# Altium PCB PCB1.PcbDoc
Units mm, origin at the board's own origin, x right, y up, seen from the top; angles counter-clockwise.
Board outline 152.4 x 101.6 mm, 2 copper layers (Top Layer, Bottom Layer); 8 components, 5 nets, 19 pads, 0 vias.
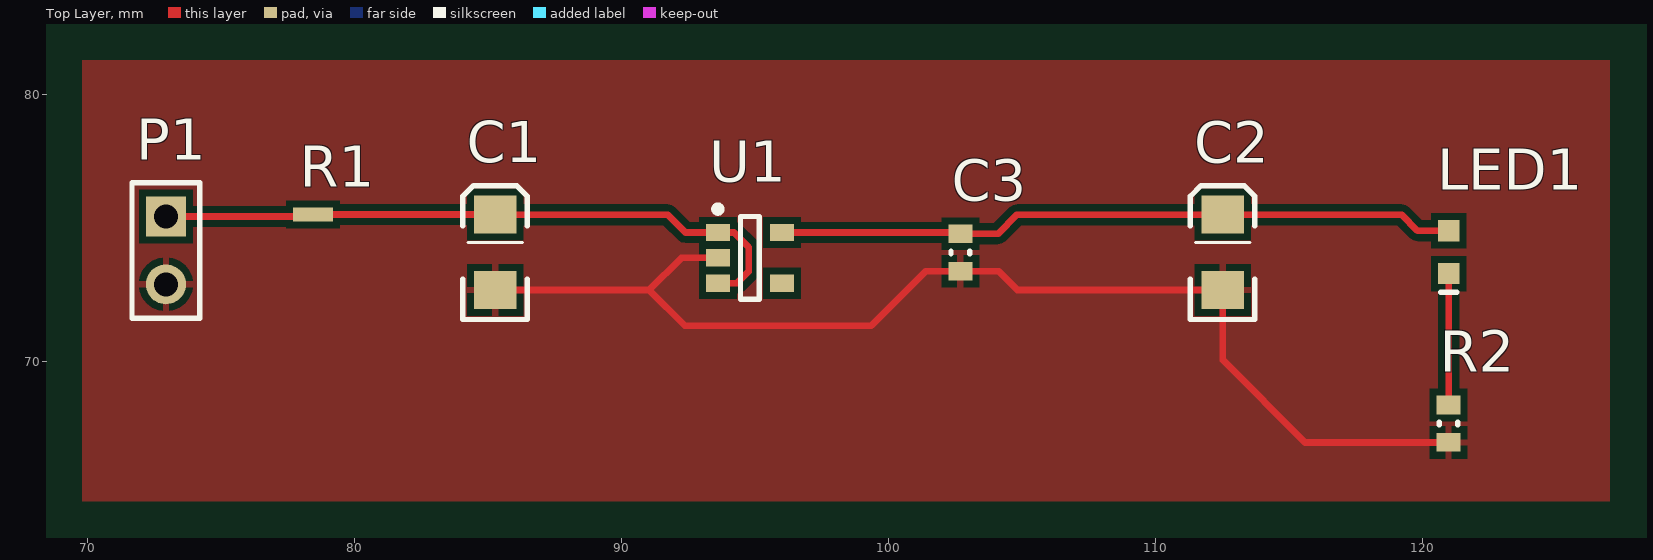
[diagram p0: Top Layer view]
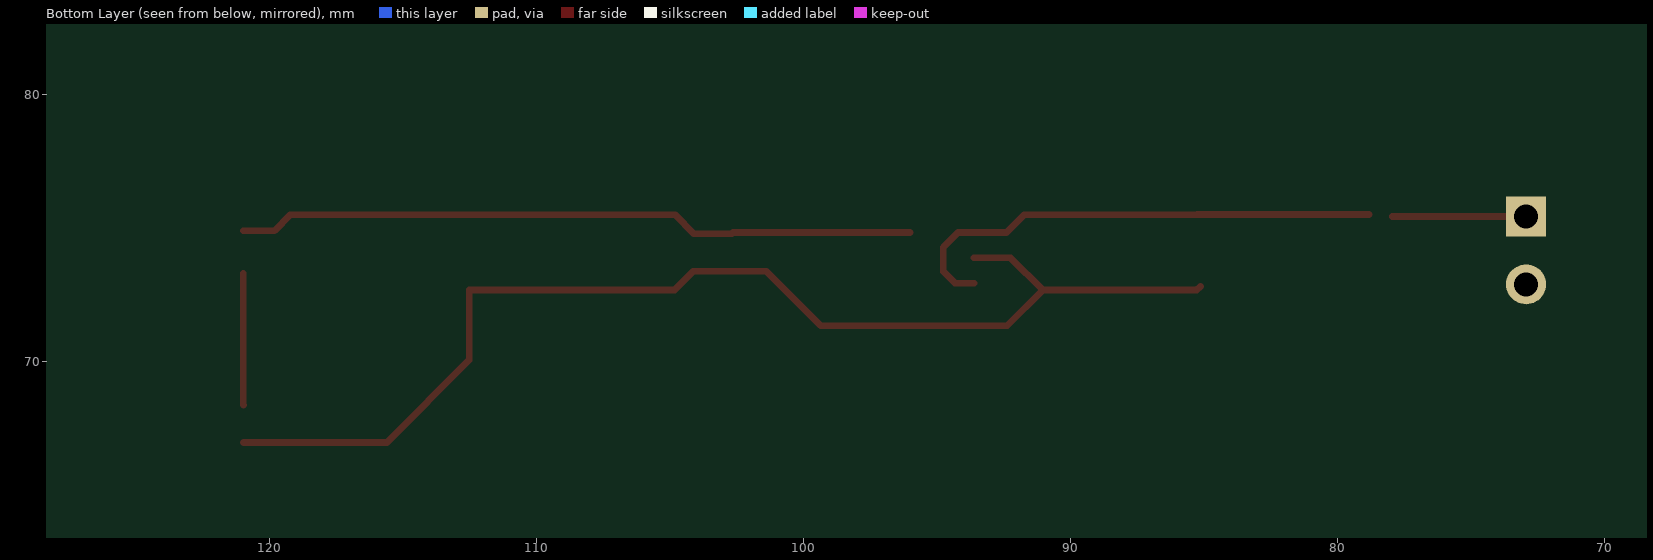
[diagram p1: Bottom Layer view, seen from below]

## Layer stack, top to bottom
Top Solder: solder mask 0.0102, Solder Resist, Dk 3.5
Top Layer: signal copper 0.0356
Dielectric1: dielectric 0.32, FR-4, Dk 4.8
Bottom Layer: signal copper 0.0356
Bottom Solder: solder mask 0.0102, Solder Resist, Dk 3.5

## Board outline
25.4,25.4 177.8,25.4 177.8,127 25.4,127

## Design rules (kind name [scope] priority, off if disabled: settings)
Clearance [All] p1: gap=0.254 ignorepadtopadclearanceinfootprint=FALSE except(0: Arc-Hole Track-Hole SMDPad-Hole THPad-Hole Via-Hole Fill-Hole Poly-Hole Region-Hole Text-Hole)
PolygonConnect PolygonConnect_NetTie [HasFootprint('NetTie')] p1: connectstyle=Direct reliefconductorwidth=0.254 reliefentries=4 polygonreliefangle="90 Angle" airgapwidth=0.254
PolygonConnect [All] p2: connectstyle=Relief reliefconductorwidth=0.254 reliefentries=4 polygonreliefangle="90 Angle" airgapwidth=0.254
RoutingVias [All] p1: holewidth=0.711 width=1.27 viastyle="Through Hole" minholewidth=0.711 minwidth=1.27 maxholewidth=0.711 maxwidth=1.27
ShortCircuit ShortCircuit_1 [InNet('GND') vs InNet('CGND')] p1: allowed=TRUE
ShortCircuit [All] p2: allowed=FALSE
SolderMaskExpansion [All] p1: expansion=0.102
Width [All] p1: maxlimit=0.508 minlimit=0.254 preferedwidth=0.254
29 further rules are at their usual default settings.

## Components (designator, comment, footprint, x,y, rotation, side; value= is the part's Value field where it differs from the comment)
C1 "10µF" CAPC3216_L 85.281,74.083 r90 top
C2 "10µF" CAPC3216_L 112.521,74.083 r90 top
C3 "0.1µF" CAPC0603_L 102.695,74.09 r90 top
LED1 "Red" 0603_A 120.98,74.103 r90 top
P1 "Header 2" HDR1X2 72.949,75.438 r270 top
R1 "NetTie" NetTie 78.461,75.514 r0 top net-tie
R2 "10K" RESC0603_L 120.97,67.68 r90 top value="10000.00 Ohm"
U1 "MIC5205-3.3" SOT-23-OT5_L 94.815,73.89 r0 top

## Footprints (in the part's own frame and the unit in brackets; to place one, negate y for a bottom-side part, rotate by r counter-clockwise, add the part's x,y. Pads: shape width x height; smd on the part's side, far side on the other; paste and mask are expansions set on the pad)
0603_A [mm] "Chip LED, 2-Leads, Body 1.6x0.8mm, IPC Medium Density"
  rect 0.8x0.8 smd: 1(-0.8,0) 2(0.8,0)
  silkscreen extent -1.5,-0.3 -1.5,0.3, body extent -0.8,-0.4 0.8,0.4, height 0.7
CAPC0603_L [mm] "Chip Capacitor, Body 1.6x0.8mm, Height 1.0mm, IPC High Density"
  rect 0.7x0.9 smd: 1(-0.7,0) 2(0.7,0)
  silkscreen extent -0.05,-0.35 0.05,0.35, body extent -0.87,-0.47 0.88,0.48, height 1
CAPC3216_L [mil] "EIA3216"
  rect 56x63 smd: 1(56,0) 2(-55.12,0)
  silkscreen extent -98,-47 99,48, body extent -55,-34 57,34, height 79
HDR1X2 [mm] "Connector; Header; 2 Position"
  rect 1.5x1.5 hole 0.9: 1(0,0)
  round 1.5 hole 0.9: 2(2.54,0)
  silkscreen extent -1.27,-1.27 3.81,1.27
NetTie [mil]
  rect 30x20 smd mask-15.75: 1(-14.5,0) 2(14.5,0)
RESC0603_L [mm] "Chip Resistor, Body 1.6x0.8mm, IPC High Density"
  rect 0.7x0.9 smd: 1(-0.7,0) 2(0.7,0)
  silkscreen extent -0.05,-0.35 0.05,0.35, body extent -0.85,-0.47 0.85,0.47, height 0.6
SOT-23-OT5_L [mm] "SOT23, 5-Leads, Body 2.9x1.6mm, Pitch 0.95mm, Lead Span 2.7mm, IPC High Density"
  rect 0.9x0.65 smd: 1(-1.2,0.95) 2(-1.2,0) 3(-1.2,-0.95) 4(1.2,-0.95) 5(1.2,0.95)
  silkscreen extent -1.32,-1.55 0.35,1.95, body extent -0.9,-1.55 0.9,1.55, height 1.45

## Part data
C1 C2: library part CAP_10uF, "CAP TANT 10UF 10V 10% 1206", ESR (Equivalent Series Resistance)="3.8 Ohm", Lifetime @ Temp.="2000 Hrs @ 85°C", Manufacturer=Kemet, Manufacturer Part Number=T491A106K010AT, Manufacturer Size Code=A, Operating Temperature="-55°C ~ 125°C", Package / Case="1206 (3216 Metric)", Supplier Part Number 1=399-3684-1-ND, TOLERANCE=±10%, Voltage - Rated=10V, Capacitance=10µF, Category=Capacitors, ComponentLink1Description=http://www.kemet.com/Lists/ProductCatalog/Attachments/254/KEM_T2005_T491.pdf, ComponentLink1URL=http://www.kemet.com/Lists/ProductCatalog/Attachments/254/KEM_T2005_T491.pdf, Features="General Purpose", Height - Seated (Max)="0.071\" (1.80mm)", Lead Spacing=-, Mounting Type="Surface Mount", Packaging="Cut Tape (CT)", Pricing 1="1=0.38, 10=0.337, 50=0.2044, 100=0.1684, 250=0.13468, 500=0.12266, 1000=0.11063 (USD)", RoHS="RoHS Compliant", Size / Dimension="0.126\" L x 0.063\" W (3.20mm x 1.60mm)", Stock 1=578846, Supplier 1=Digi-Key, Type=Molded
C3: library part CAP_100nF, "CAP CER 0.1UF 25V 10% X5R 0603", Manufacturer="Samsung Electro-Mechanics America, Inc", Manufacturer Part Number=CL10A104KA8NNNC, Operating Temperature="-55°C ~ 85°C", Package / Case="0603 (1608 Metric)", Ratings=-, Supplier Part Number 1=1276-1857-1-ND, Temperature Coefficient=X5R, TOLERANCE=±10%, Voltage - Rated=25V, Applications="General Purpose", Capacitance=0.1µF, Category=Capacitors, ComponentLink1Description=http://www.samsungsem.com/global/support/library/product-catalog/__icsFiles/afieldfile/2014/11/13/MLCC.pdf, ComponentLink1URL=http://www.samsungsem.com/global/support/library/product-catalog/__icsFiles/afieldfile/2014/11/13/MLCC.pdf, Features=-, Height - Seated (Max)=-, Lead Spacing=-, Lead Style=-, Mounting Type="Surface Mount, MLCC", Packaging="Cut Tape (CT)", Pricing 1="1=0.1, 10=0.036, 25=0.0256, 100=0.0165, 500=0.01156, 1000=0.009 (USD)", RoHS="RoHS Compliant", Size / Dimension="0.063\" L x 0.031\" W (1.60mm x 0.80mm)", Stock 1=17485, Supplier 1=Digi-Key, Thickness (Max)="0.035\" (0.90mm)"
LED1: library part LED_RED_0603, "SMD mono-color Chip LED, Red", Current - Test=20mA, Lens Color=Colorless, Manufacturer="Lite-On Inc", Manufacturer Part Number=LTST-C190KRKT, Millicandela Rating=99mcd, Package / Case="0603 (1608 Metric)", Supplier Part Number 1=160-1436-1-ND, Voltage - Forward (Vf) (Typ)=2V, Category=Optoelectronics, Color=Red, ComponentLink1Description=http://optoelectronics.liteon.com/upload/download/DS-22-99-0151/S_110_LTST-C190KRKT.pdf, ComponentLink1URL=http://optoelectronics.liteon.com/upload/download/DS-22-99-0151/S_110_LTST-C190KRKT.pdf, Height (Max)=0.80mm, Lens Style/Size="Rectangle with Flat Top, 1.10mm x 0.80mm", Lens Transparency=Clear, Mounting Type="Surface Mount", Packaging="Cut Tape (CT)", Pricing 1="1=0.28, 10=0.218, 100=0.1188, 250=0.0792, 500=0.06732, 1000=0.05148 (USD)", RoHS="RoHS Compliant", Size / Dimension="1.60mm L x 0.80mm W", Stock 1=295836, Supplier 1=Digi-Key, Viewing Angle=130°, Wavelength - Dominant=631nm, Wavelength - Peak=639nm
P1: "Header, 2-Pin", LatestRevisionDate=17-Jul-2002, LatestRevisionNote="Re-released for DXP Platform.", Publisher="Altium Limited"
R1: "Used to bridge two uniquely named Nets together"
R2: library part RES_10K, "RES SMD 10K OHM 5% 1/10W 0603", Case-EIA=0603, Case-Metric=1608, Manufacturer="Panasonic Electronic Components", Manufacturer Part Number=ERJ-3GEYJ103V, Operating Temperature="-55°C ~ 155°C", Package / Case="0603 (1608 Metric)", POWER="0.1 W", Power (Watts)="0.1W, 1/10W", Resistance (Ohms)=10k, Supplier Part Number 1=P10KGCT-ND, Temperature Coefficient=±200ppm/°C, TOLERANCE="5 %", Category=Resistors, ComponentLink1Description=http://industrial.panasonic.com/www-cgi/jvcr13pz.cgi?E+PZ+3+AOA0001+ERJ3GEYJ103V+7+WW, ComponentLink1URL=http://industrial.panasonic.com/www-cgi/jvcr13pz.cgi?E+PZ+3+AOA0001+ERJ3GEYJ103V+7+WW, Composition="Thick Film", Features="Automotive AEC-Q200", Height="0.022\" (0.55mm)", Number of Terminations=2, Packaging="Cut Tape (CT)", Pricing 1="1=0.1, 50=0.0096, 100=0.0071, 250=0.00544, 500=0.00436, 1000=0.00321 (USD)", RoHS="RoHS Compliant", Size / Dimension="0.063\" L x 0.031\" W (1.60mm x 0.80mm)", Stock 1=4017868, Supplier 1=Digi-Key, Supplier Device Package=0603, Technology=SMT
U1: library part MIC5205, "Voltage Regulator 3.3V", Current - Limit (Min)=-, Current - Output=150mA, Manufacturer="Microchip Technology", Manufacturer Part Number=MIC5205-3.3YM5-TR, Operating Temperature="-40°C ~ 125°C", Package / Case="SC-74A, SOT-753", Supplier Device Package=SOT-23-5, Supplier Part Number 1=576-1259-1-ND, Voltage - Dropout (Typical)="0.165V @ 150mA", Voltage - Input="Up to 16V", Voltage - Output=3.3V, Category="Integrated Circuits (ICs)", ComponentLink1Description=http://www.microchip.com/mymicrochip/filehandler.aspx?ddocname=en579613, ComponentLink1URL=http://www.microchip.com/mymicrochip/filehandler.aspx?ddocname=en579613, Mounting Type="Surface Mount", Number of Regulators=1, Packaging="Cut Tape (CT)", Pricing 1="1=0.4, 25=0.33, 100=0.3 (USD)", Regulator Topology="Positive Fixed", RoHS="RoHS Compliant", Stock 1=20178, Supplier 1=Digi-Key

## Nets (pads, with @x,y where several pads share a name; then routed paths per layer and width w, separated by ;. In a path a pad name is that pad's centre, name@x,y a point inside that pad or via, vN(x,y) a via of type N, cw(c..) or ccw(c..) an arc to the next point about the centre after c; other vN are vias at no path point)
3V3: C2.1 C3.2 LED1.2 U1.5 | length 25.5
  Top Layer w0.254: U1.5 102.645,74.84 C3.2 104.1,74.79 104.815,75.505 C2.1 119.215,75.505 119.817,74.902 LED1.2
3V7: C1.1 R1.2 U1.1 U1.3 | length 18.7
  Top Layer w0.254: R1.2 85.272,75.514 C1.1 91.735,75.505 92.4,74.84 U1.1 94.22,74.84 94.77,74.29 94.77,73.38 94.33,72.94 U1.3
GND: C1.2 C2.2 C3.1 P1.2 R2.1 U1.2 | length 44.5
  Top Layer w0.254: C1.2@85.144,72.82 C1.2 91.043,72.683 ; U1.2 92.25,73.89 91.043,72.683 ; R2.1 115.6,66.98 112.521,70.059 C2.2 104.827,72.683 104.12,73.39 C3.1 101.4,73.39 99.36,71.35 92.375,71.35 91.043,72.683
NetLED1_1: LED1.1 R2.2 | length 4.9
  Top Layer w0.254: R2.2 120.98,68.39 LED1.1
VBAT: P1.1 R1.1 | length 5
  Top Layer w0.254: P1.1 R1.1@77.964,75.438
pads on no net: U1.4

## Polygon pours and split planes (outlines as drawn)
GND on Top Layer "GND" (solid, remove dead copper, pour order 2): 69.825,81.28 69.825,64.77 127,64.77 127,81.28